# Altium PCB PCB1.PcbDoc (part 2 of 2)
Units mm, origin at the board's own origin, x right, y up, seen from the top; angles counter-clockwise.
Board outline 50 x 65 mm, 2 copper layers (Top Layer, Bottom Layer), stack 1.671 mm thick; 71 components, 49 nets, 263 pads, 156 vias.
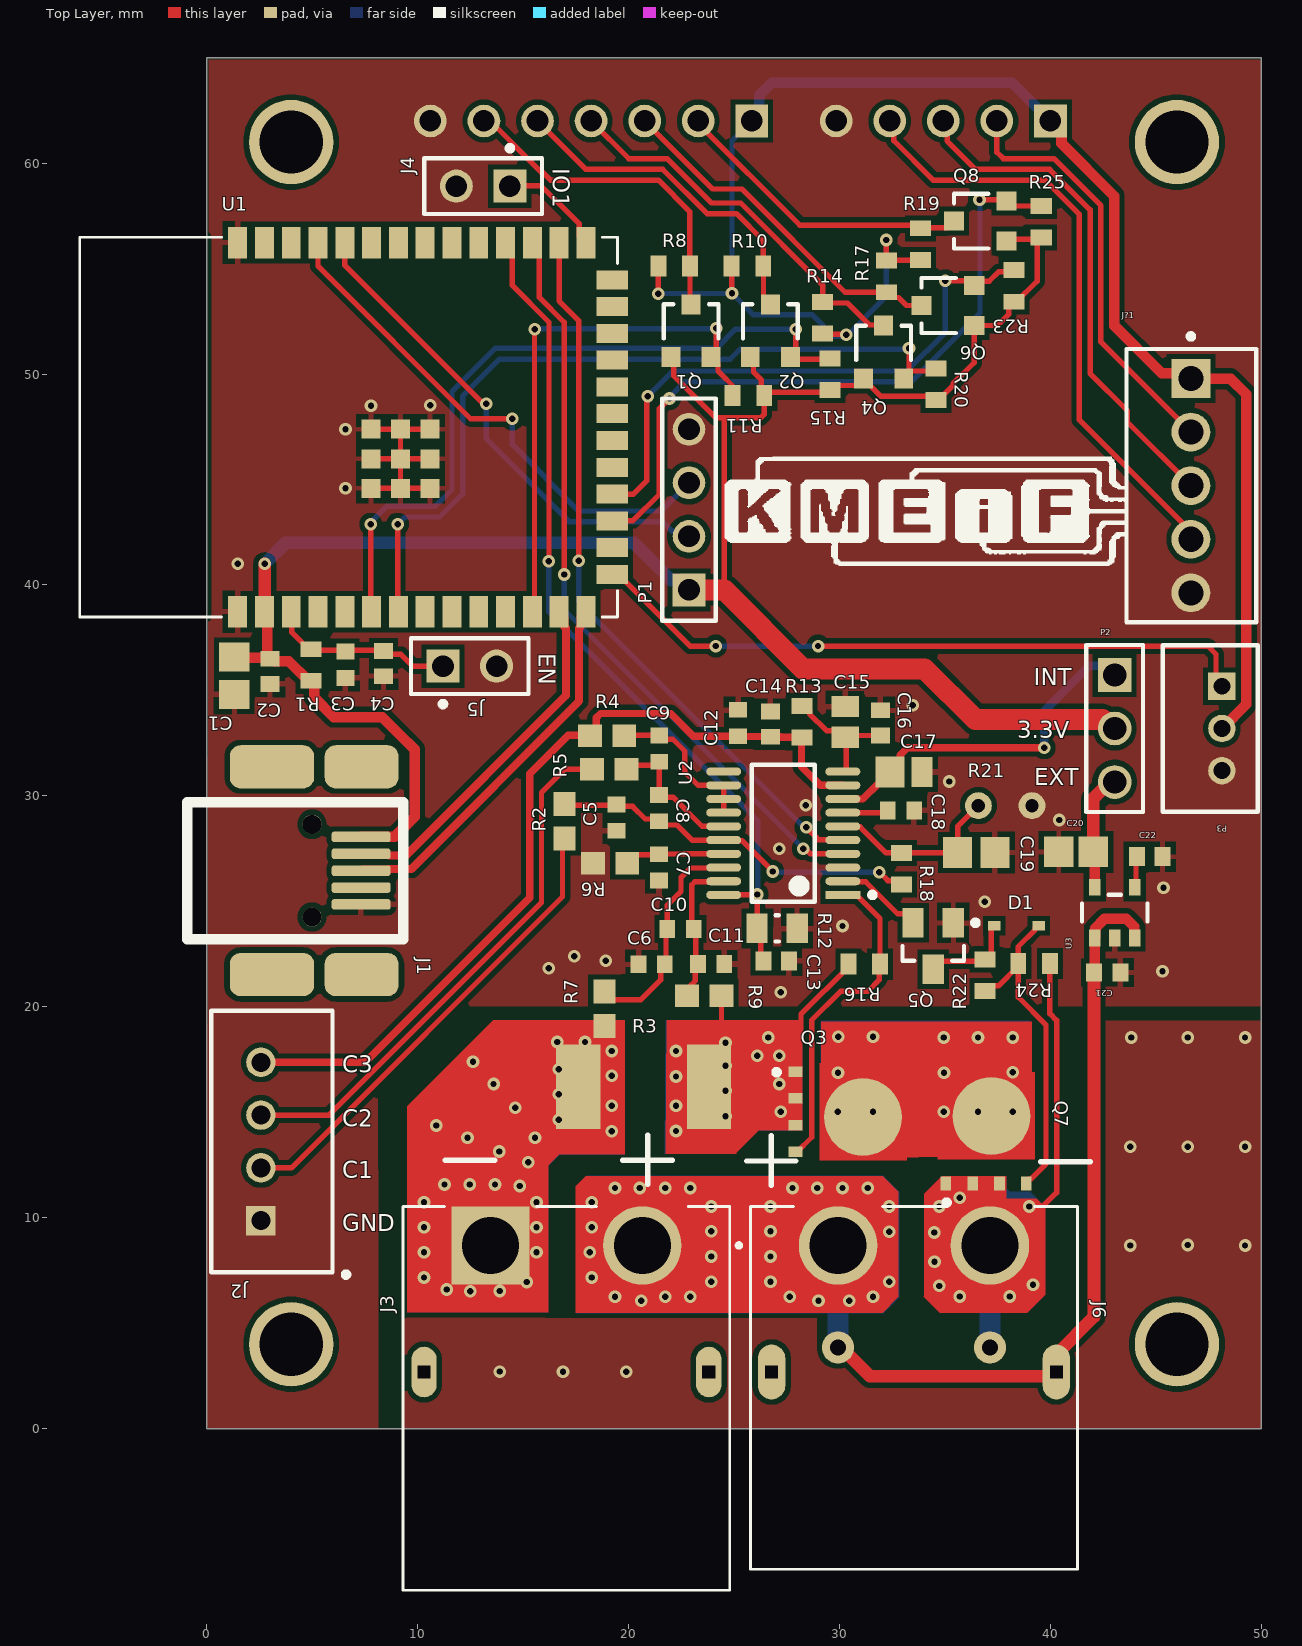
[diagram p0: Top Layer view]

## Via types
v1: diameter 0.6, hole 0.3, Top Layer to Bottom Layer, 156 vias

## Nets (pads, with @x,y where several pads share a name; then routed paths per layer and width w, separated by ;. In a path a pad name is that pad's centre, name@x,y a point inside that pad or via, vN(x,y) a via of type N, cw(c..) or ccw(c..) an arc to the next point about the centre after c; other vN are vias at no path point) (continued)
NetC21_1: (continued)
  other v1: 20.592,6.067 29,6.067 30.462,6.067 19.356,6.25 21.73,6.25 22.925,6.25 27.645,6.25 31.591,6.25 23.911,6.965 26.731,6.965 32.364,6.965 18.25,7.161 23.911,8.16 26.731,8.16 18.151,8.357 32.364,9.339 23.911,9.359 26.731,9.359 18.25,9.555 23.911,10.534 26.731,10.534 32.364,10.534 18.25,10.73 19.356,11.407 20.531,11.407 21.73,11.407 22.925,11.407 27.77,11.407 28.945,11.407 30.144,11.407 31.339,11.407
NetC22_1: C22.1 U3.4 | length 1.5
  Top Layer w0.254: U3.4 44.055,25.723 44.055,27.061 C22.1
NetD1_1: D1.1 Q5.3 R22.2 | length 4.9
  Top Layer w0.254: Q5.3 34.442,21.786 34.815,22.159 36.813,22.159 R22.2 36.925,22.247 R22.2@37.173,22.495 ; R22.2@36.901,22.223 R22.2@37.173,22.495 ; D1.1 37.299,23.841 37.201,23.743 37.201,22.495 R22.2@37.173,22.495
NetD1_2: D1.2 Q7.4 R22.1 R24.2 | length 15.7
  Top Layer w0.254: R22.1 37.15,20.995 37.539,20.995 R24.2@38.474,21.93 ; Q7.4 38.854,11.694 38.977,11.817 39.052,11.817 39.787,12.551 39.787,19.146 38.474,20.459 R24.2@38.474,21.93 ; D1.2 39.384,23.841 39.286,23.743 39.286,23.673 38.474,22.861 R24.2 R24.2@38.474,21.93
NetJ2_2: J2.2 R2.1 | length 22.4
  Top Layer w0.254: J2.2 4.014,12.365 16.868,25.218 16.868,27.892 R2.1
NetJ2_3: J2.3 R5.1 | length 25.5
  Top Layer w0.254: J2.3 5.795,14.865 15.868,24.937 15.868,30.16 16.964,31.257 R5.1
NetJ4_1: J4.1 U1.27 | length 5.1
  Top Layer w0.254: J4.1 14.382,58.922 15.859,58.922 17.651,57.129 17.651,56.557 U1.27
NetJ6_2: J6.2 pad.3@38.5,8.884 pad.5 Q7.1 Q7.2 Q7.3 R24.1 | length 20
  Top Layer w0.254: J6.2 37.793,8.684 40.295,11.186 40.295,19.356 39.974,19.677 R24.1
  Bottom Layer w1: pad.5 J6.2
  other v1: 35.703,6.267 38.077,6.267 34.723,6.766 39.173,6.822 34.507,7.916 34.492,9.297 34.73,10.534 39.003,10.534 35.702,10.945
NetJ?1_1: J?1.1 P3.2 P4.1 P5.1 R8.2 R10.2 R14.2 R17.2 R19.2 | length 81.1
  Top Layer w0.254: v1(21.412,53.805) R8.2 ; R10.2 24.892,55.121 24.892,53.841 v1(24.901,53.832) ; R14.2 29.231,51.892 30.289,51.892 v1(30.319,51.862) ; v1(32.21,56.358) 32.21,55.399 R17.2 32.244,55.395 33.824,55.395 R19.2
  Top Layer w0.5: P4.1 40.525,61.475 40.525,60.935 43.02,58.44 43.02,52.301 45.282,50.039 46.409,50.039 J?1.1@46.632,49.816 ; J?1.1@46.669,49.779 48.54,49.779 49.283,49.036 49.283,34.337 48.142,33.196 P3.2
  Bottom Layer w0.254: v1(21.412,53.805) 21.425,53.818 24.888,53.818 v1(24.901,53.832) ; P5.1 24.901,61.061 v1(24.901,53.832) ; v1@30.319,51.786 32.21,53.677 v1(32.21,56.358) ; v1(30.319,51.862) 30.253,51.796 29.753,51.796 29.743,51.786 28.72,52.809 25.924,52.809 v1(24.901,53.832)
  Bottom Layer w0.5: P5.1 26.204,62.364 26.204,63.232 26.793,63.821 38.179,63.821 P4.1
NetJ?1_2: J?1.2 P4.2 | length 20
  Top Layer w0.254: P4.2 37.46,60.518 37.766,60.212 40.172,60.212 42.389,57.995 42.389,51.518 J?1.2
NetJ?1_3: J?1.3 P4.3 | length 24.2
  Top Layer w0.254: P4.3 35.103,61.817 35.103,61.056 36.455,59.704 39.962,59.704 41.881,57.784 41.881,50.03 43.651,48.261 43.651,47.717 J?1.3
NetJ?1_4: J?1.4 P4.4 | length 28.9
  Top Layer w0.254: P4.4 32.573,61.807 32.573,61.066 34.442,59.196 39.751,59.196 41.373,57.574 41.373,47.823 46.659,42.538 J?1.4
NetP1_2: P1.2 U1.36 | length 23.7
  Top Layer w0.254: U1.36 6.544,55.154 13.044,48.654 13.188,48.654 v1(13.254,48.587)
  Bottom Layer w0.254: v1(13.254,48.587) 13.254,46.921 17.175,43 21.611,43 22.059,42.552 22.615,42.552 P1.2
NetP1_3: P1.3 U1.37 | length 24.8
  Top Layer w0.254: U1.37 5.274,55.118 12.516,47.877 v1(14.487,47.877)
  Bottom Layer w0.254: v1(14.487,47.877) 14.487,46.651 17.63,43.508 21.527,43.508 P1.3
NetP3_1: P3.1 U1.15 | length 31.8
  Top Layer w0.254: U1.15 19.524,40.499 22.92,37.103 v1(24.133,37.103) ; v1(28.983,37.103) 47.463,37.103 47.85,36.716 47.85,35.474 P3.1
  Bottom Layer w0.254: v1(24.133,37.103) v1(28.983,37.103)
NetP5_2: P5.2 Q8.3 R19.1 | length 14.2
  Top Layer w0.254: P5.2 23.3,61.874 28.113,57.061 33.688,57.061 R19.1 ; R19.1@34.146,57.061 34.146,56.996 34.212,56.931 35.104,56.931 Q8.3
NetP5_3: P5.3 Q6.3 R17.1 | length 16.7
  Top Layer w0.254: P5.3 21.941,60.819 23.982,58.778 25.371,58.778 30.268,53.88 R17.1 32.477,53.632 32.792,53.632 33.17,53.254 Q6.3@33.863,53.254
NetP5_4: P5.4 Q4.3 R14.1 | length 18.3
  Top Layer w0.254: P5.4 20.008,60.212 21.829,60.212 23.93,58.112 25.318,58.112 29.197,54.233 29.197,53.426 R14.1 ; R14.1@29.202,53.372 30.369,53.372 31.413,52.328 32.063,52.328 Q4.3
NetP5_5: P5.5 Q2.3 R10.1 | length 16.3
  Top Layer w0.254: P5.5 17.976,59.704 21.619,59.704 23.719,57.604 25.108,57.604 26.382,56.329 R10.1 ; R10.1@26.394,55.243 26.394,53.631 Q2.3
NetP5_6: P5.6 Q1.3 R8.1 | length 15.9
  Top Layer w0.254: P5.6 13.44,62 15.899,59.541 15.958,59.541 16.303,59.196 21.409,59.196 22.896,57.709 22.896,55.146 R8.1 22.912,53.363 Q1.3@22.915,53.36
NetQ1_2: Q1.2 R11.1 U1.12 | length 26
  Top Layer w0.254: U1.12 15.539,38.839 15.539,52.114 v1(15.543,52.118) ; Q1.2@23.891,50.834 24.24,50.485 24.24,50.145 25.104,49.281 25.104,49.156 R11.1 ; Q1.2 24.155,51.046 v1(24.155,52.176)
  Bottom Layer w0.254: v1(15.543,52.118) 15.572,52.147 24.126,52.147 v1(24.155,52.176)
NetQ2_2: Q2.2 R15.1 U1.6 | length 34.3
  Top Layer w0.254: v1(7.772,42.877) 7.772,38.776 U1.6 ; v1(27.917,52.128) 27.917,51.059 Q2.2 27.765,50.711 29.522,50.711 R15.1
  Bottom Layer w0.254: v1(7.772,42.877) 7.772,42.97 8.197,43.396 8.197,43.399 8.535,43.736 10.844,43.736 11.624,44.516 11.624,49.166 13.674,51.216 24.158,51.216 25.07,52.128 v1(27.917,52.128)
NetQ3_1: pad.3@24.327,16.202 Q3.1 Q3.2 Q3.3 R3.2 R9.1 R16.1 | length 11.4
  Top Layer w0.254: R3.2 24.407,16.8 R9.1 ; Q3.1 27.838,16.93 27.138,17.63 v1(27.138,17.675) 28.174,18.711 28.174,19.649 30.419,21.894 R16.1
  other v1: 22.246,14.114 24.593,14.817 27.221,15.022 22.246,15.31 24.593,16.012 27.138,16.337 22.246,16.693 24.593,17.211 26.092,17.675 22.246,17.906 24.593,18.302 26.621,18.542
NetQ3_4: Q3.4 R16.2 U2.1 | length 15.7
  Top Layer w0.254: Q3.4 27.988,13.12 28.682,13.814 28.682,19.373 30.044,20.735 31.339,20.735 31.891,21.287 31.891,21.991 R16.2 31.919,24.179 30.796,25.303 U2.1
NetQ3_5-6-7-8: pad.3@33.958,16.129 Q3.5-6-7-8 Q7.5-6-7-8
  other v1: 29.915,15.025 31.591,15.025 34.942,15.022 36.564,15.025 38.219,15.022 29.926,16.866 34.954,16.878 38.219,16.889 34.942,18.542 36.564,18.542 38.219,18.542 29.937,18.585 31.591,18.585
NetQ4_2: Q4.2 R20.1 U1.7 | length 37.4
  Top Layer w0.254: v1(9.046,42.877) 9.046,38.772 U1.7 ; Q4.2 33.158,49.909 33.293,50.044 v1(33.293,51.217) ; Q4.2@33.368,50.144 34.449,50.144 R20.1
  Bottom Layer w0.254: v1(9.046,42.877) 9.389,43.22 11.046,43.22 12.132,44.306 12.132,48.955 13.884,50.708 24.82,50.708 25.293,51.181 33.258,51.181 v1(33.293,51.217)
NetQ5_2: Q5.2 U2.2 | length 4.2
  Top Layer w0.254: U2.2 30.183,25.929 31.237,25.929 32.76,24.406 33.119,24.406 33.492,24.033 Q5.2
NetQ6_2: Q6.2 R23.1 U1.18 | length 27.4
  Top Layer w0.254: U1.18 20.224,44.309 20.862,44.947 20.862,48.899 v1(20.914,48.951) ; v1(35.016,54.422) 36.17,54.422 Q6.2 36.586,54.402 37.096,54.402 37.542,54.849 38.192,54.849 R23.1
  Bottom Layer w0.254: v1(20.914,48.951) 22.104,50.142 33.182,50.142 35.016,51.976 v1(35.016,54.422)
NetQ8_2: Q8.2 R25.1 U1.17 | length 32.4
  Top Layer w0.254: U1.17 19.237,43.052 20.206,43.052 21.457,44.302 21.457,48.36 v1(21.941,48.844) ; v1(36.639,58.263) 37.868,58.263 38.162,57.969 R25.1
  Bottom Layer w0.254: v1(21.941,48.844) 21.941,48.915 22.66,49.634 33.392,49.634 36.663,52.905 36.663,58.239 v1(36.639,58.263)
NetU1_28: U1.28 U2.5 | length 34.6
  Top Layer w0.254: U1.28 16.704,53.465 17.631,52.538 v1(17.631,41.146) ; v1(28.415,28.507) 28.995,27.927 30.134,27.927 U2.5
  Bottom Layer w0.254: v1(17.631,41.146) 17.631,39.192 22.94,33.883 28.142,28.68 28.148,28.68 28.321,28.507 v1(28.415,28.507)
NetU1_29: U1.29 U2.4 | length 36
  Top Layer w0.254: U1.29 15.757,55.911 15.757,53.646 16.95,52.454 v1(16.95,40.499) ; v1(28.285,27.496) 28.379,27.496 28.622,27.253 U2.4
  Bottom Layer w0.254: v1(16.95,40.499) 16.95,38.825 28.279,27.496 v1(28.285,27.496)
pads on no net: J1.4 J1.6 J1.7 J1.8 J1.9 J1.X J1.Y J3.S1 J3.S2 J6.S1 U1.4 U1.5 U1.8 U1.9 U1.10 U1.11 U1.16 U1.19 U1.20 U1.21 U1.22 U1.23 U1.24 U1.25 U1.26 U1.31 U1.32 U1.33 U1.34 U1.35 U1.38 U1.39 U2.11

## Polygon pours and split planes (outlines as drawn)
GND on Top Layer "GND_L01_P001" (solid, remove dead copper, pour order 1): 0.097,64.903 49.903,64.903 50,65 50,0 0,0
GND on Top Layer "GND_L01_P002" (solid, pour order 2): 14.637,20.441 14.637,18.553 14.626,18.542 16.771,18.542 16.771,20.439 16.774,20.441
GND on Bottom Layer "GND_L02_P000" (solid, pour order 0): 0,64.805 0.195,65 50,65 50,0 0,0

## Other copper
Top Layer:
  pour cut-out: 28.912,3.982 28.914,3.984 28.914,5.382 29.544,5.382 30.062,4.864
  pour cut-out: 9.241,12.279 9.241,15.368 13.221,19.348 11.528,19.348 8.105,15.925 8.105,12.279
  pour cut-out: 9.241,12.279 8.124,12.279 8.124,0 9.302,0
  pour cut-out: 16.123,20.016 11.972,20.016 11.972,19.369 16.106,19.369
  pour cut-out: 16.241,5.241 17.431,5.241 17.179,5.494 16.467,5.494
  region net NetJ6_2: 37.903,11.965 37.903,10.908 39.356,10.908 39.744,10.494 39.744,6.345 38.899,5.5 34.75,5.5 34,6.25 34.017,6.267 34.017,11.142 34.84,11.965
  pour cut-out: 31.172,22.396 31.414,22.396 31.414,21.763 31.293,21.642 31.166,21.642
  region net NetC21_1: 17.965,11.965 17.5,11.5 17.5,5.5 32.042,5.5 32.792,6.25 32.792,11.22 32.047,11.965
  pour cut-out: 27.75,14 27.753,13.997 27.753,12.526 28.415,12.526 28.198,12.743 27.918,12.743
  pour cut-out: 32.042,5.241 34.75,5.241 33.924,6.067 32.975,6.067
  pour cut-out: 16.123,20.016 50,20.016 50,19.348 16.123,19.348
  region net GND: 16.201,5.521 16.201,12.493 16.722,13.014 16.725,13.011 19.809,13.011 19.809,19.369 13.58,19.369 9.5,15.289 9.5,5.521
  region net NetQ3_1: 21.766,13.032 21.773,13.025 25.095,13.025 25.095,13.073 26.177,14.156 28.223,14.156 28.223,19.356 21.797,19.356
  region net NetQ3_5-6-7-8: 39.103,19.291 29.139,19.291 29.139,12.884 39.103,12.884
  pour cut-out: 26.5,24.679 26.887,24.679 26.887,23.777 26.554,23.777 26.5,23.723
Bottom Layer:
  pour cut-out: 9.214,12.646 9.214,15.321 13.194,19.301 11.514,19.301 8.078,15.866 8.078,12.646
  pour cut-out: 9.242,12.195 8.124,12.195 8.124,0 9.302,0
  pour cut-out: 11.972,20.016 50,20.016 50,19.348 11.972,19.348
  region net NetC21_1: 18.032,11.98 32.07,11.98 32.163,11.863 32.825,11.201 32.825,6.231 32.075,5.481 17.533,5.481 17.533,11.481
  region net NetJ6_2: 37.903,11.971 37.903,11.407 38.081,11.23 39.022,11.243 39.731,10.534 39.724,10.527 39.704,6.267 39.701,6.267 38.919,5.5 34.75,5.5 34,6.25 34.017,6.267 34.017,11.142 34.849,11.974 34.852,11.971
  region net NetQ3_1: 28.193,14.126 28.223,14.156 28.223,19.356 26.9,19.356 26.887,19.368 21.751,19.368 21.72,13.044 21.727,13.036 25.049,13.036 25.049,13.085 26.089,14.126
  region net GND: 19.809,12.99 19.809,19.348 13.58,19.348 9.5,15.268 9.5,5.521 16.201,5.521 16.201,12.472 16.722,12.993 16.725,12.99
  region net NetQ3_5-6-7-8: 29.114,19.333 29.114,12.925 39.012,12.925 39.012,19.333

## Silkscreen, mask and mechanical layers (free items; w line width, h text height)
Top Overlay:
  drawing of 7 lines, arcs and shapes, not listed
  text "IO1" at 16.392,59.768 h0.8 r270
  text "EN" at 15.728,36.771 h0.8 r270
  text "INT" at 39.203,35.239 h0.8
  text "3.3V" at 38.436,32.737 h0.8
  text "EXT" at 39.24,30.51 h0.8
  text "C3" at 6.429,16.868 h0.8
  text "C2" at 6.429,14.321 h0.8
  text "C1" at 6.429,11.868 h0.8
  text "GND" at 6.429,9.368 h0.8
Bottom Overlay:
  lines w0.254: 29.131,1.794 30.66,1.794 ; 29.92,1.031 29.92,2.504 ; 36.302,2 37.903,2
  text "GND" at 10.959,60.406 h0.8 r90
  text "SCK" at 13.49,60.368 h0.8 r90
  text "MISO" at 16.11,60.375 h0.8 r90
  text "GND" at 30.214,60.305 h0.8 r90
  text "H3" at 32.731,60.309 h0.8 r90
  text "H1" at 37.836,60.318 h0.8 r90
  text "MOSI" at 18.637,60.301 h0.8 r90
  text "RESET" at 21.194,60.301 h0.8 r90
  text "5V" at 26.285,60.26 h0.8 r90
  text "H2" at 35.314,60.253 h0.8 r90
  text "5V" at 40.481,60.268 h0.8 r90
  text "SS" at 23.717,60.2 h0.8 r90
  text "5V" at 45.071,49.341 h0.8
  text "GND" at 21.264,46.977 h0.8
  text "H1" at 45.071,46.801 h0.8
  text "TX" at 21.235,44.398 h0.8
  text "H2" at 44.951,44.37 h0.8
  text "H3" at 44.942,41.94 h0.8
  text "RX" at 21.193,41.876 h0.8
  text "GND" at 44.942,39.347 h0.8
  text "3.3V" at 21.151,39.157 h0.8
  text "PWM" at 47.049,34.736 h0.8
  text "3.3V" at 47.049,32.715 h0.8
  text "GND" at 46.968,30.747 h0.8

## Text inside footprints (layer, text, board x,y; h text height)
U1: Top Assembly "ANTENNA" at -2.776,42.984 h1.27 r90